# Altium PCB BrushlessMiniModule.PcbDoc
Units mm, origin at the board's own origin, x right, y up, seen from the top; angles counter-clockwise.
Board outline 68 x 52 mm, 2 copper layers (Top Layer, Bottom Layer), stack 1.571 mm thick; 44 components, 31 nets, 148 pads, 29 vias.
Unrouted connection lines stored in the file: 67.
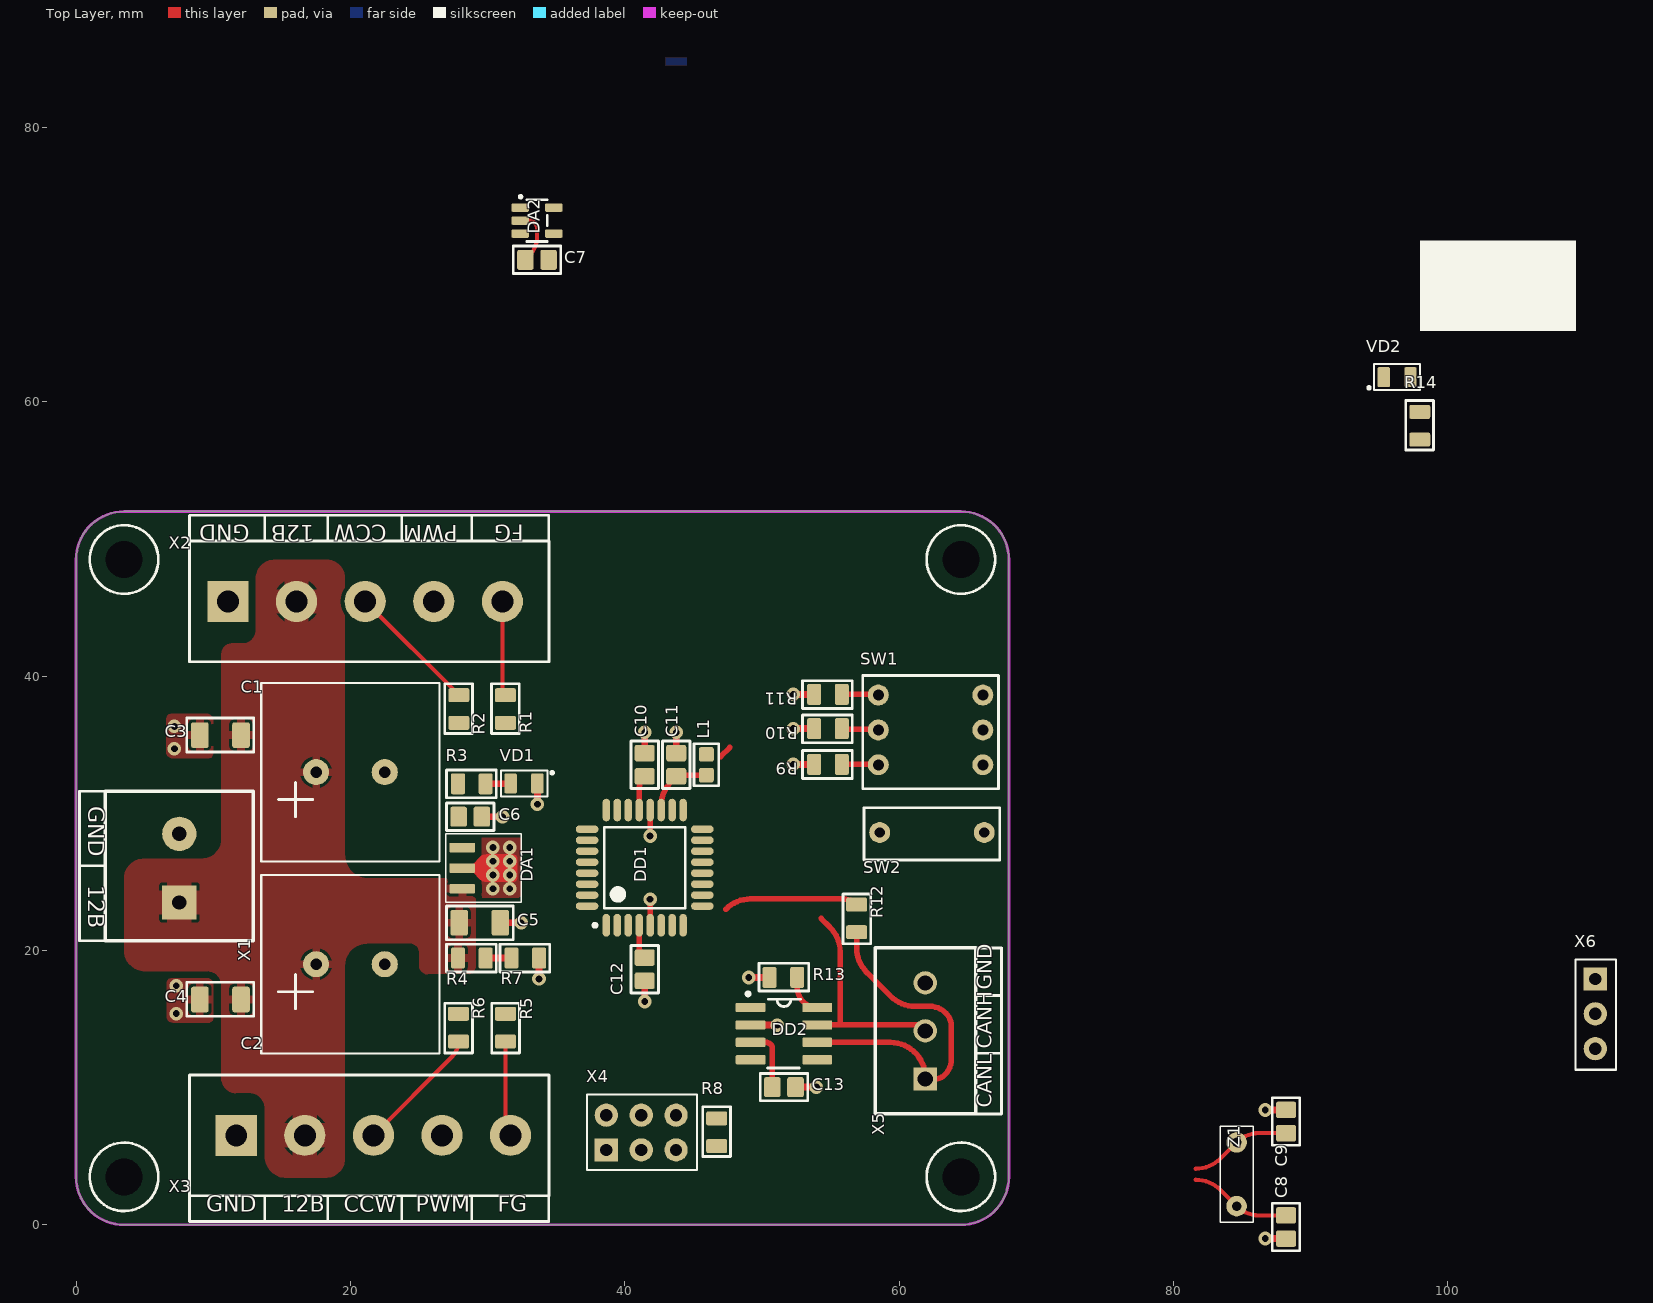
[diagram p0: Top Layer view]
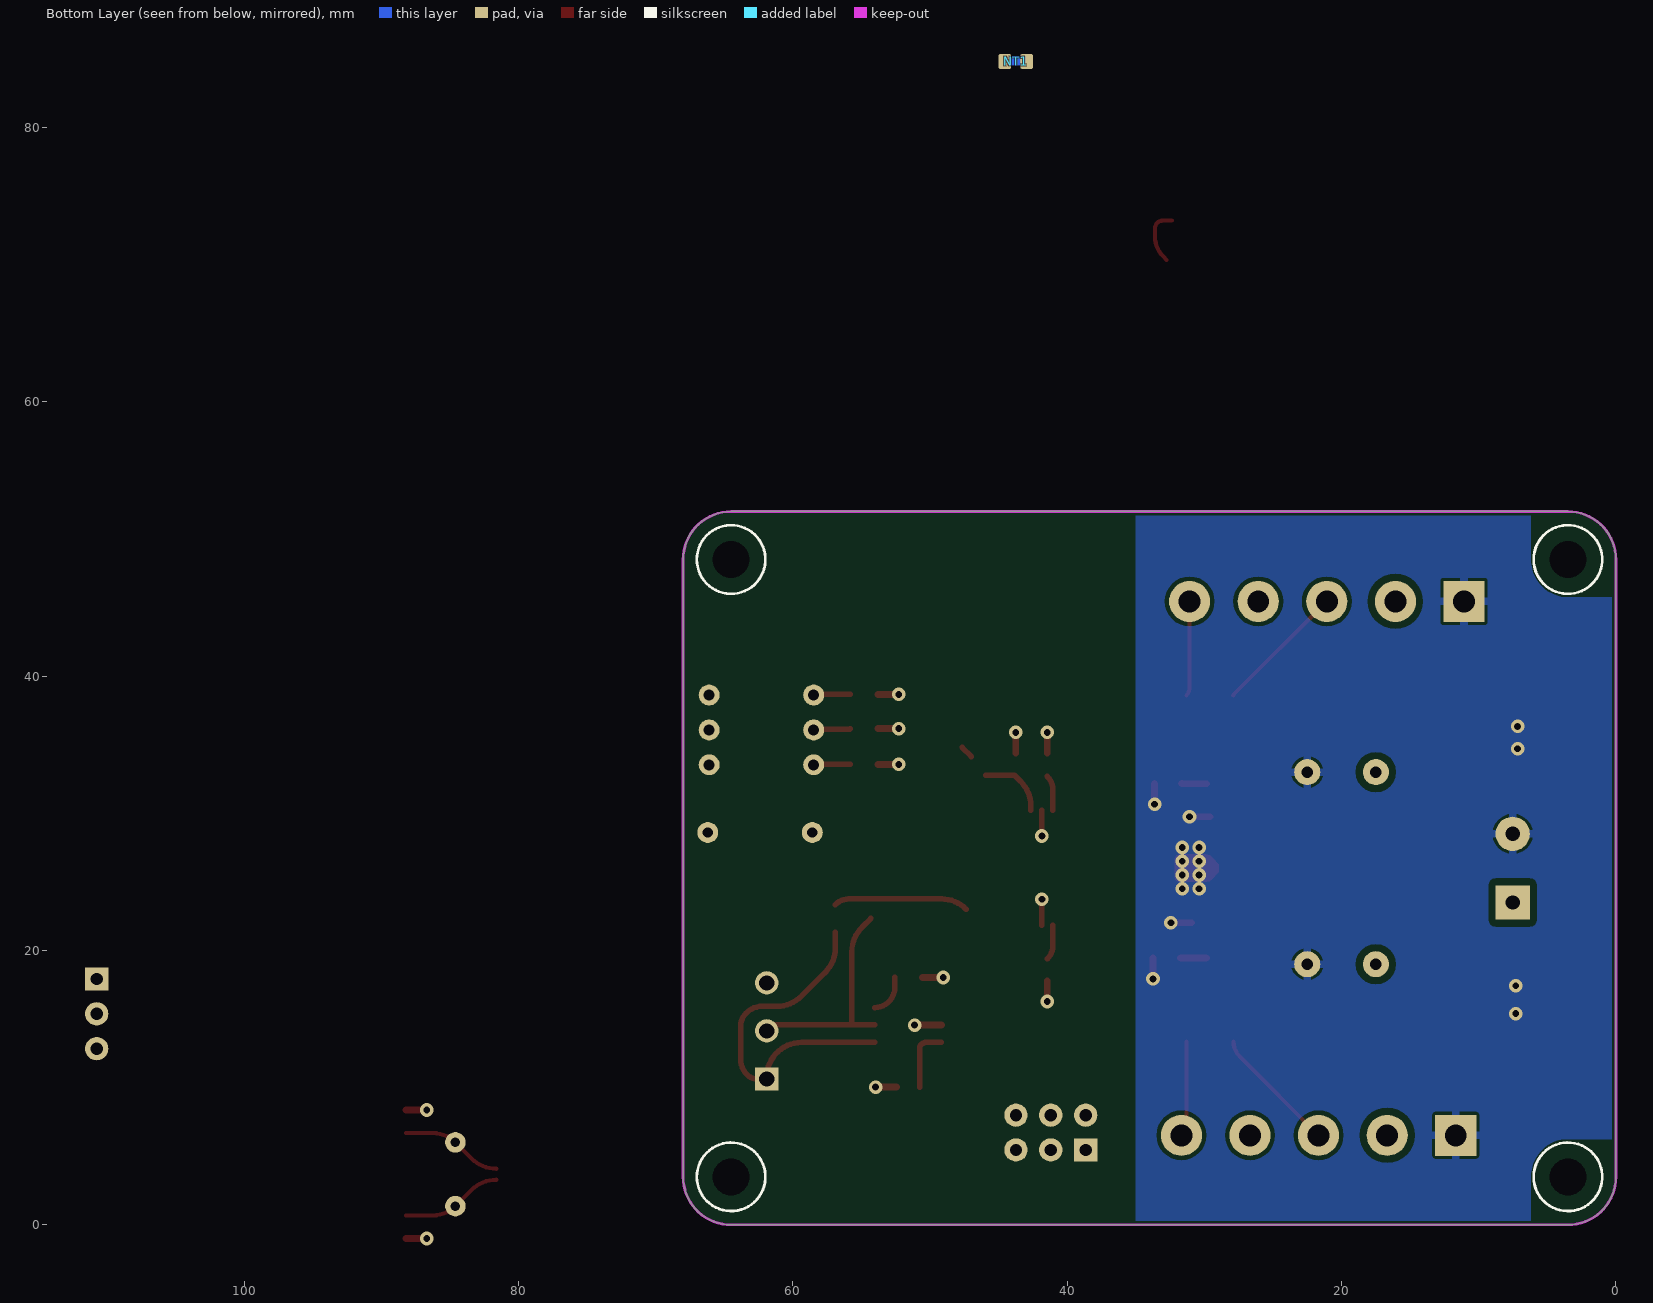
[diagram p1: Bottom Layer view, seen from below]

## Layer stack, top to bottom
Top Solder: solder mask 0.0102, Solder Resist, Dk 3.5
Top Layer: signal copper 0.0356
Dielectric 1: dielectric 1.5, FR-4, Dk 4.8
Bottom Layer: signal copper 0.0356
Bottom Solder: solder mask 0.0102, Solder Resist, Dk 3.5

## Board outline
0,3.5 ccw(c3.5,3.5) 3.5,0 64.5,0 ccw(c64.5,3.5) 68,3.5 68,48.5 ccw(c64.5,48.5) 64.5,52 3.5,52 ccw(c3.5,48.5) 0,48.5

## Design rules (kind name [scope] priority, off if disabled: settings)
Clearance Clearance_POWER_12B [InNet('12B') vs InNet('GND')] p1: gap=0.5
Clearance Clearance_POWER_5B [InNet('5B') vs InNet('DGND')] p2: gap=0.3 except(0.2: SMDPad-SMDPad; 0.4: Arc-THPad Track-THPad THPad-THPad THPad-Fill THPad-Poly THPad-Region)
Clearance [All] p3: gap=0.2 except(0.3: Arc-THPad Track-THPad THPad-THPad THPad-Via THPad-Fill THPad-Poly THPad-Region THPad-Text)
HoleSize [All] p1: absolutevalues=TRUE maxlimit=5 minlimit=0.2 maxpercent=80.000 minpercent=20.000
HoleToHoleClearance [All] p1: gap=0 allowstackedmicrovias=TRUE
MinimumSolderMaskSliver [All] p1: minsoldermaskwidth=0.15
PolygonConnect NetTieDirect [InComponentClass('NetTieDirect')] p1: connectstyle=Direct reliefconductorwidth=0.254 reliefentries=4 polygonreliefangle="90 Angle" airgapwidth=0.254
PolygonConnect NetTieRelief [InComponentClass('NetTieRelief')] p2: connectstyle=Direct reliefconductorwidth=0.6 reliefentries=4 polygonreliefangle="90 Angle" airgapwidth=0.2
PolygonConnect PolygonConnect_GND [HasFootprint('TERMINAL 2 way-5mm') vs InNet('GND')] p3: connectstyle=Direct reliefconductorwidth=0.6 reliefentries=4 polygonreliefangle="90 Angle" airgapwidth=0.2
PolygonConnect PolygonConnect_GND_12B [HasFootprint('TERMINAL-2WAY-5MM') vs InNet('12B')] p4: connectstyle=Relief reliefconductorwidth=1.8 reliefentries=4 polygonreliefangle="90 Angle" airgapwidth=0.2
PolygonConnect PolygonConnect_GND_12B_2 [HasFootprint('TERMINAL-5WAY-5MM') vs InNet('12B')] p5: connectstyle=Relief reliefconductorwidth=1.8 reliefentries=4 polygonreliefangle="90 Angle" airgapwidth=0.2
PolygonConnect PolygonConnect_GND_12B_3 [HasFootprint('TERMINAL-5WAY-5MM_') vs InNet('12B')] p6: connectstyle=Relief reliefconductorwidth=1.8 reliefentries=4 polygonreliefangle="90 Angle" airgapwidth=0.2
PolygonConnect PolygonConnect_GND_12B_1 [HasFootprint('TERMINAL 3 way-3.5mm') vs InNet('12B')] p7: connectstyle=Direct reliefconductorwidth=0.6 reliefentries=4 polygonreliefangle="90 Angle" airgapwidth=0.2
PolygonConnect PolygonConnect_GND_1 [HasFootprint('TERMINAL 3 way-3.5mm') vs InNet('GND')] p8: connectstyle=Direct reliefconductorwidth=0.6 reliefentries=4 polygonreliefangle="90 Angle" airgapwidth=0.2
PolygonConnect PolygonConnect_via [IsVia] p9: connectstyle=Direct reliefconductorwidth=0.6 reliefentries=4 polygonreliefangle="90 Angle" airgapwidth=0.2
PolygonConnect [All] p10: connectstyle=Relief reliefconductorwidth=0.6 reliefentries=4 polygonreliefangle="90 Angle" airgapwidth=0.2
RoutingVias [All] p1: holewidth=0.711 width=1.27 viastyle="Through Hole" minholewidth=0.711 minwidth=1.27 maxholewidth=0.711 maxwidth=1.27
SilkToSilkClearance [All] p1: silktosilkclearance=0
SilkToSolderMaskClearance [IsPad] p1: minsilkscreentomaskgap=0 clearancetoexposedcopper=TRUE
SolderMaskExpansion [All] p1: expansion=0.05
Width [All] p1: maxlimit=3 minlimit=0.2 preferedwidth=0.3
25 further rules are at their usual default settings.

## Components (designator, comment, footprint, x,y, rotation, side; value= is the part's Value field where it differs from the comment)
C1 "Capacitor_pol" K50-35(13X25)_V 20,33 r90 top
C2 "Capacitor_pol" K50-35(13X25)_V 20,19 r90 top
C3 "Capacitor" C1206 10.552,35.724 r0 top
C4 "Capacitor" C1206 10.552,16.45 r0 top
C5 "Capacitor" C1206 29.4,22 r180 top
C6 "Capacitor" C0805 28.73,29.75 r180 top
C7 "Capacitor" C0805 33.6,70.347 r180 top
C8 "Capacitor" C0805 88.2,-0.158 r270 top
C9 "Capacitor" C0805 88.2,7.532 r90 top
C10 "Capacitor" C0805 41.45,33.538 r270 top
C11 "Capacitor" C0805 43.75,33.538 r270 top
C12 "Capacitor" C0805 41.45,18.638 r90 top
C13 "Capacitor" C0805 51.6,10.038 r180 top
DA1 "L78L05ABUTR" SOT-89-3 28.15,26 r270 top
DA2 "LMV321ILT" SOT23-5 33.6,73.205 r0 top
DD1 "ATmega32M1-AU" TQFP-32 41.45,26.038 r90 top
DD2 "MCP2551-I/SN" SO8 51.6,13.938 r0 top
L1 "Inductor" L0603 45.95,33.538 r90 top
NT1 "" Pofigistor0603 43.75,84.805 r0 bottom net-tie
R1 "Resistor_0,125Вт" R0805 31.3,37.6 r90 top
R2 "Resistor_0,125Вт" R0805 27.9,37.6 r90 top
R3 "Resistor_0,125Вт" R0805 28.85,32.15 r180 top
R4 "Resistor_0,125Вт" R0805 28.85,19.45 r180 top
R5 "Resistor_0,125Вт" R0805 31.306,14.375 r270 top
R6 "Resistor_0,125Вт" R0805 27.875,14.375 r270 top
R7 "Resistor_0,125Вт" R0805 32.746,19.45 r180 top
R8 "Resistor_0,125Вт" R0805 46.7,6.75 r90 top
R9 "Resistor_0,125Вт" R0805 54.81,33.57 r180 top
R10 "Resistor_0,125Вт" R0805 54.81,36.17 r180 top
R11 "Resistor_0,125Вт" R0805 54.81,38.67 r180 top
R12 "Resistor_0,125Вт" R0805 56.9,22.338 r270 top
R13 "Resistor_0,125Вт" R0805 51.563,18.038 r0 top
R14 "Resistor_0,125Вт" R0805 97.95,58.25 r90 top
SW1 "Name" DIP3 66.1,33.537 r90 top
SW2 "DS1040-01" DIP1 66.2,28.6 r90 top
VD1 "LED" L_0805 32.65,32.18 r180 top
VD2 "LED" L_0805 96.3,61.793 r0 top
X1 "Header_2_trm" TERMINAL-2WAY-5MM 7.525,26 r90 top
X2 "Header_5_trm" TERMINAL-5WAY-5MM 21.075,45.448 r0 top
X3 "Header_5_trm" TERMINAL-5WAY-5MM_ 21.675,6.525 r0 top
X4 "Программатор ISP mkII" PLS2-6 41.296,6.735 r90 top
X5 "Header_3_trm" TERMINAL-3WAY-3.5MM 61.9,5.388 r90 top
X6 "Header_3_plg" PLS-3 110.75,15.382 r0 top
Z1 "Crystal" HC-49S 84.6,3.687 r270 top

## Footprints (in the part's own frame and the unit in brackets; to place one, negate y for a bottom-side part, rotate by r counter-clockwise, add the part's x,y. Pads: shape width x height; smd on the part's side, far side on the other; paste and mask are expansions set on the pad)
C0805 [mm]
  rrect25% 1.21x1.46 smd paste-5: 1(-0.845,0) 2(0.845,0)
  silkscreen extent -1.73,-1 1.73,1, body extent -1,-0.62 1,0.63, height 0.78
C1206 [mm]
  rrect25% 1.28x1.87 smd: 1(-1.528,-0.024) 2(1.472,-0.024)
  silkscreen extent -2.48,-1.25 2.4,1.23, body extent -1.6,-0.85 1.6,0.85, height 1.75
DIP1 [mil]
  round 60 hole 30: 1(0,0) 2(0,300)
  silkscreen extent -79,-45 71,345, body extent -80,-42 71,342, height 269
DIP3 [mil]
  round 60 hole 31.5: 1(0,0) 2(100,0) 3(200,0) 4(200,300) 5(100,300) 6(0,300)
  silkscreen extent -69,-45 256,345, body extent -69,-43 251,346, height 276
HC-49S [mm] "Кварцевый резонатор"
  round 1.5 hole 0.7: 1(-2.325,0) 2(2.325,0)
  silkscreen extent -3.5,-1.2 3.5,1.2, body extent -5.67,-2.32 5.68,2.33, height 3.6
K50-35(13X25)_V [mm]
  round 1.9 hole 0.85 mask+0.102: 1(0,2.5)
  round 1.9 hole 0.85: 2(0,-2.5)
  silkscreen extent -6.5,-6.5 6.5,6.5, body extent -6.25,-6.25 6.25,6.25, height 25
L0603 [mm]
  rrect25% 1.05x1.07 smd paste-5: 1(-0.76,0) 2(0.76,0)
  silkscreen extent -1.53,-0.9 1.53,0.9, body extent -0.8,-0.4 0.8,0.4, height 0.8
L_0805 [mm] "SMD LED LAMP"
  rrect25% 0.91x1.46 smd: 1(-0.975,0) 2(0.975,0)
  silkscreen extent -2.15,-0.95 1.68,0.95, body extent -1.01,-0.62 1.01,0.63, height 1.1
PLS2-6 [mm] "Разъем для программатора ISP"
  rect 1.7x1.7 hole 0.9: 1(-1.275,2.64)
  round 1.7 hole 0.9: 2(1.265,2.64) 3(-1.275,0.1) 4(1.265,0.1) 5(-1.275,-2.44) 6(1.265,-2.44)
  silkscreen extent -2.73,-3.98 2.77,4.05, body extent -2.54,-3.81 2.54,3.81, height 8.54
PLS-3 [mm] "Разъем для программатора ISP"
  rect 1.7x1.7 hole 0.9: 1(0,2.54)
  round 1.7 hole 0.9: 2(0,0) 3(0,-2.54)
  silkscreen extent -1.45,-4.08 1.5,3.95, body extent -1.26,-3.91 1.28,3.71, height 8.54
Pofigistor0603 [mm]
  rrect25% 0.92x1.08 smd paste+0: 1(-0.8,0)
  rrect25% 0.92x1.08 smd: 2(0.8,0)
  Top Layer region: -0.8,0.3 0.8,0.3 0.8,-0.3 -0.8,-0.3
R0805 [mm] "Chip Resistor, 2-Leads, Body 2,10x1,30mm, IPC Medium Density"
  rrect25% 1.02x1.53 smd paste-5: 1(-1.008,0) 2(1.008,0)
  silkscreen extent -1.78,-1 1.85,1.02, body extent -1.1,-0.7 1.1,0.7, height 0.55
SO8 [mm]
  rrect25% 2.17x0.68 smd: 1(-2.43,1.905) 2(-2.43,0.635) 3(-2.43,-0.635) 4(-2.43,-1.905) 5(2.43,-1.905) 6(2.43,-0.635) 7(2.43,0.635) 8(2.43,1.905)
  silkscreen extent -2.74,-2.5 1.2,3.02, body extent -3,-2.54 3,2.54, height 1.7
SOT23-5 [mm]
  rrect25% 1.26x0.61 smd: 1(-1.225,0.95) 2(-1.225,0) 3(-1.225,-0.95) 4(1.225,-0.95) 5(1.225,0.95)
  silkscreen extent -1.3,-1.52 0.75,1.84, body extent -1.6,-1.56 1.6,1.55, height 1.45
SOT-89-3 [mm]
  rrect25% 0.7x1.87 smd: 1(-1.5,0) 2(0,0) 3(1.5,0)
  Top Layer region: -0.3,0.8 -0.829,1.329 -0.956,1.518 -1,1.741 -1,1.741 -1,3.7 -0.96,3.85 -0.85,3.96 -0.7,4 -0.7,4 0.7,4 0.85,3.96 0.96,3.85 1,3.7 1,3.7 1,1.741 0.956,1.518 0.829,1.329 0.829,1.329 0.3,0.8
  silkscreen extent -2.5,-1.2 2.5,4.3, body extent -2.25,-0.5 2.25,3.75, height 1.54
TERMINAL-2WAY-5MM [mm]
  rect 2.5x2.5 hole 1.05: 1(-2.5,0)
  round 2.5 hole 1.05: 2(2.5,0)
  silkscreen extent -5.3,-5.4 5.6,5.4, body extent -5,-5.07 5.3,5.13, height 14.3
TERMINAL-3WAY-3.5MM [mm]
  rect 1.7x1.7 hole 1.1: 1(5.25,0)
  round 1.7 hole 1.1: 2(8.75,0) 3(12.25,0)
  silkscreen extent 2.7,-3.7 14.8,3.65, body extent 3,-3.37 14.5,3.43, height 8.4
TERMINAL-5WAY-5MM [mm]
  rect 3x3 hole 1.6: 1(-10,0)
  round 3 hole 1.6: 2(-5,0) 3(0,0) 4(5,0) 5(10,0)
  silkscreen extent -12.8,-4.4 13.4,4.4, body extent -12.5,-4.1 13.07,4.05, height 10
TERMINAL-5WAY-5MM_ [mm]
  rect 3x3 hole 1.6: 1(-10,0)
  round 3 hole 1.6: 2(-5,0) 3(0,0) 4(5,0) 5(10,0)
  silkscreen extent -13.4,-4.4 12.8,4.4, body extent -13.08,-4.05 12.48,4.1, height 10
TQFP-32 [mm] "Thin QFP, 32-Leads, Body 7x7mm, Pitch 0.8mm, IPC Medium Density"
  oval 1.65x0.55 smd: 1(-4.2,2.8) 2(-4.2,2) 3(-4.2,1.2) 4(-4.2,0.4) 5(-4.2,-0.4) 6(-4.2,-1.2) 7(-4.2,-2) 8(-4.2,-2.8) 17(4.2,-2.8) 18(4.2,-2) 19(4.2,-1.2) 20(4.2,-0.4) 21(4.2,0.4) 22(4.2,1.2) 23(4.2,2) 24(4.2,2.8)
  oval 0.55x1.65 smd: 9(-2.8,-4.2) 10(-2,-4.2) 11(-1.2,-4.2) 12(-0.4,-4.2) 13(0.4,-4.2) 14(1.2,-4.2) 15(2,-4.2) 16(2.8,-4.2) 25(2.8,4.2) 26(2,4.2) 27(1.2,4.2) 28(0.4,4.2) 29(-0.4,4.2) 30(-1.2,4.2) 31(-2,4.2) 32(-2.8,4.2)
  silkscreen extent -4.32,-2.95 2.95,3.75, body extent -4.6,-4.6 4.6,4.6, height 1.2

## Part data
C1 C2: library part cap262, "Конденсатор полярный"
C3 C4: library part cap188, "Конденсатор"
C5: library part cap183, "Конденсатор"
C6 C7 C10 C11 C12 C13: library part cap161, "Конденсатор"
C8 C9: library part cap222, "Конденсатор"
DA1: library part pwr6, "Cтабилизатор напряжения (+5В; 0.1А), 4%, (-40...+125C)"
DA2: library part amp10, "HIGH-DRIVE OPERATIONAL AMPLIFIERS WITH SHUTDOWN"
DD1: library part microcont12, "Микроконтроллер 8-Бит, AVR, 16МГц, 32КБ Flash"
DD2: library part interf12, "High-Speed CAN Transceiver"
L1: library part ind0, "EMI Suppression Filter"
NT1: library part res1930
R1 R2 R5 R6 R8 R9 R10 R11 R13: library part res97, "Резистор"
R3 R7 R14: library part res66, "Резистор"
R4: library part res76, "Резистор"
R12: library part res51, "Резистор"
SW1: library part btn6, "DIP переключатель адреса"
SW2: library part btn1, "DIP переключатель"
VD1 VD2: library part diode5, "Светодиод"
X1: library part connect21, "Разъем - 2 конт. клеммник"
X2: library part connect61, "Разъем - 5 конт. клеммник"
X3: library part connect62, "Разъем - 5 конт. клеммник"
X4: library part connect0, "Разъем - 6 конт. розетка"
X5: library part connect35, "Разъем - 3 конт. клеммник"
X6: library part connect33, "Разъем - 3 конт. вилка"
Z1: library part crystal7, "Кварцевый резонатор"

## Free pads (board coordinates)
  round 0 hole 2.7 unplated: ""(3.5,3.5) ""(3.5,48.5) ""(64.5,3.5) ""(64.5,48.5)

## Via types
v1: diameter 1, hole 0.5, Top Layer to Bottom Layer, tented both sides, 29 vias

## Nets (pads, with @x,y where several pads share a name; then routed paths per layer and width w, separated by ;. In a path a pad name is that pad's centre, name@x,y a point inside that pad or via, vN(x,y) a via of type N, cw(c..) or ccw(c..) an arc to the next point about the centre after c; other vN are vias at no path point)
5B: C6.2 C7.2 C12.2 C13.2 DA1.1 DA2.2 DD1.4 DD2.3 L1.2 R1.1 R2.1 R3.2 R5.1 R6.1 R8.2 SW1.4 SW1.5 SW1.6 X4.2 | length 11.3
  Top Layer w0.3: DA2.2 33.05,73.205 cw(c33.05,72.655) 33.6,72.655 33.6,72.055 cw(c31.515,72.055) 32.989,70.581 C7.2
  Top Layer w0.4: DD1.4 41.05,20.348 ccw(c42.416,20.348) C12.2@41.45,19.383 ; DD2.3 50.29,13.303 cw(c50.29,12.838) 50.755,12.838 C13.2
12B: C1.1 C2.1 C3.2 C4.2 C5.2 DA1.3 R4.2 X1.1 X2.2 X3.2
ADR0: DD1.17 R11.1 SW1.1 | length 2.5
  Top Layer w0.4: R11.1 58.29,38.67
ADR1: DD1.18 R10.1 SW1.2 | length 2.5
  Top Layer w0.4: R10.1 ccw(c55.914,36.266) 55.914,36.13 58.29,36.13
ADR2: DD1.22 R9.1 SW1.3 | length 2.5
  Top Layer w0.4: R9.1 58.242,33.57 ccw(c58.242,33.638) 58.29,33.59
CW/CCW_A: DD1.23 R2.2 X2.3 | length 9.7
  Top Layer w0.3: X2.3 ccw(c21.112,45.448) 21.086,45.422 R2.2
CW/CCW_B: DD1.24 R6.2 X3.3 | length 9.3
  Top Layer w0.3: X3.3 27.421,12.271 ccw(c26.324,13.368) R6.2
DGND: C7.1 C8.2 C9.2 C10.1 C11.1 C12.1 C13.1 DA2.5 DD1.5 DD1.20 DD2.2 NT1.2 R9.2 R10.2 R11.2 R13.1 VD2.1 X4.6 X5.3 X6.3 | length 20.9
  Top Layer w0.4: DD1.5 v1(41.85,23.738) ; v1(41.85,28.337) DD1.20
  Top Layer w0.5: v1(41.45,16.275) C12.1 ; C10.1 v1(41.45,35.9) ; C11.1 v1(43.75,35.9) ; v1(49.037,18.038) R13.1 ; DD2.2 v1@51.12,14.573 ; v1(52.285,33.57) R9.2 ; v1(52.285,36.17) R10.2 ; v1(52.285,38.67) R11.2 ; C13.1 v1(53.963,10.038) ; v1(86.682,-1.003) C8.2 ; v1(86.682,8.377) C9.2
  other v1: 51.12,14.555
FG_A: DD1.26 R1.2 X2.5 | length 6.9
  Top Layer w0.3: X2.5 31.075,39.151 ccw(c31.843,39.151) R1.2
FG_B: DD1.27 R5.2 X3.5 | length 6.9
  Top Layer w0.3: R5.2 31.306,7.416 ccw(c32.566,7.416) X3.5
GND: C1.2 C2.2 C3.1 C4.1 C5.1 C6.1 DA1.2 NT1.1 R7.1 VD1.1 X1.2 X2.1 X3.1 | length 6.1
  Top Layer w0.5: C6.1 v1(31.093,29.75) ; C5.1 v1(32.446,22.024) ; v1(33.625,30.662) VD1.1 ; v1(33.754,17.932) R7.1
  other v1: 7.3,15.393 7.3,17.427 30.381,24.5 31.618,24.5 30.381,25.5 31.618,25.5 30.381,26.5 31.618,26.5 30.381,27.5 31.618,27.5 7.163,34.705 7.163,36.338
INF_LED: DD1.13 R14.1
MISO: DD1.1 DD1.31 R8.1 X4.1 X4.5
MOSI/TX: DD1.2 X4.4 X6.2
NetC10_2: C10.2 DD1.21 | length 2.6
  Top Layer w0.4: DD1.21 41.05,31.727 cw(c42.416,31.727) C10.2
NetC11_2: C11.2 DD1.19 L1.1 | length 5
  Top Layer w0.4: DD1.19 42.65,30.54 cw(c45.19,30.54) 43.394,32.336 C11.2 cw(c43.955,32.487) 43.955,32.777 L1.1
NetDA2_1: DA2.1 R4.1 R7.2 | length 1.9
  Top Layer w0.5: R4.1 R7.2
NetDD2_6: DD2.6 R12.2 X5.1 | length 25.6
  Top Layer w0.4: DD2.6 59.36,13.303 cw(c59.36,10.763) 61.9,10.763 X5.1 62.608,10.638 ccw(c62.608,11.662) 63.332,10.938 ccw(c62.203,12.067) 63.8,12.067 63.8,14.472 ccw(c62.434,14.472) 63.4,15.438 ccw(c62.193,14.23) 62.193,15.938 61.152,15.938 cw(c61.152,18.478) 59.356,16.681 57.644,18.394 cw(c59.44,20.19) 56.9,20.19 R12.2
NetDD2_7: DD2.7 SW2.1 X5.2 | length 16.4
  Top Layer w0.4: DD2.7 55.8,14.573 ; 54.313,22.338 54.956,21.694 cw(c53.16,19.898) 55.7,19.898 55.7,14.814 ccw(c56.041,14.814) 55.8,14.573 ; X5.2 ccw(c61.465,14.138) 61.465,14.573 55.8,14.573
NetDD2_8: DD2.8 R13.2 | length 3
  Top Layer w0.4: R13.2 52.57,17.303 ccw(c54.03,17.303) DD2.8
NetR3_1: R3.1 VD1.2 | length 1.8
  Top Layer w0.5: R3.1 31.603,32.15 ccw(c31.603,32.252) VD1.2
NetR12_1: R12.1 SW2.2 | length 10.8
  Top Layer w0.4: 46.993,34.138 47.666,34.811 ; 47.366,23.011 cw(c49.162,21.215) 49.162,23.755 55.91,23.755 cw(c55.91,22.355) R12.1
NetR14_2: R14.2 VD2.2
OSC1: C8.1 DD1.10 Z1.2 | length 7.4
  Top Layer w0.3: 81.623,3.288 cw(c81.623,0.748) 83.419,2.544 Z1.2 ccw(c86.23,2.992) 86.23,0.687 C8.1
OSC2: C9.1 DD1.11 Z1.1 | length 7.4
  Top Layer w0.3: 81.623,4.088 ccw(c81.623,6.628) 83.419,4.831 Z1.1 cw(c86.229,4.383) 86.229,6.687 C9.1
PWM_A: DD1.9 X2.4
PWM_B: DD1.3 X3.4
RX_CAN: DD1.7 DD2.4
SCK/RX: DD1.12 X4.3 X6.1
TX_CAN: DD1.6 DD2.1
VOLTAGE: DA2.3 DA2.4 DD1.14
pads on no net: DD1.8 DD1.15 DD1.16 DD1.25 DD1.28 DD1.29 DD1.30 DD1.32 DD2.5

## Polygon pours and split planes (outlines as drawn)
GND on Top Layer "Top Layer-No Net" (solid, remove dead copper, pour order 22): 9.994,34.363 9.994,36.786 ccw(c9.52,36.786) 9.52,37.26 6.959,37.26 ccw(c6.959,36.891) 6.59,36.891 6.59,34.442 ccw(c7.021,34.442) 7.02,34.011 9.638,34.008 ccw(c9.638,34.363)
GND on Top Layer "Top Layer-No Net" (solid, remove dead copper, pour order 6): 10.013,15.089 10.013,17.512 ccw(c9.539,17.512) 9.539,17.986 6.978,17.986 ccw(c6.978,17.617) 6.609,17.617 6.609,15.168 ccw(c7.04,15.168) 7.039,14.737 9.657,14.734 ccw(c9.657,15.089)
12B on Top Layer "Top Signal Layer-No Net" (solid, remove dead copper, pour order 24): 3.5,25.25 3.5,20 ccw(c5,20) 5,18.5 9.513,18.5 cw(c9.513,17.413) 10.6,17.413 10.6,10.65 ccw(c11.65,10.65) 11.65,9.6 12.65,9.6 cw(c12.65,8.5) 13.75,8.5 13.75,5 ccw(c15.325,5) 15.325,3.425 18.175,3.425 ccw(c18.175,4.85) 19.6,4.85 19.6,18.9 cw(c21.2,18.9) 21.2,20.5 24.4,20.5 cw(c24.4,19.9) 25,19.9 25,18.9 ccw(c25.65,18.9) 25.65,18.25 28.525,18.25 ccw(c28.525,18.845) 29.12,18.845 29.12,25.25 21.35,25.25 cw(c21.35,27) 19.6,27 19.6,47.15 ccw(c18.252,47.15) 18.252,48.498 14.498,48.498 ccw(c14.498,47.1) 13.1,47.1 13.1,43.35 cw(c12.15,43.35) 12.15,42.4 11.4,42.4 ccw(c11.4,41.6) 10.6,41.6 10.6,28.141 cw(c9.159,28.141) 9.159,26.7 4.95,26.7 ccw(c4.95,25.25)
GND on Top Layer "Top Signal Layer-No Net" (solid, remove dead copper, pour order 28): 29.575,28.2 29.575,23.827 32.4,23.827 32.4,28.2
GND on Bottom Layer "Top Signal Layer-No Net" (solid, remove dead copper, pour order 26): 0,52 0,0 35,0 35,52

## Keep-outs
Keep-Out Layer:
  the board outline again, w0.2

## Other copper
Bottom Layer:
  pour cut-out: 6.2,52 0,52 0,45.748 3.483,45.748 ccw(c3.483,48.464) 6.2,48.464
  pour cut-out: 6.2,0 0,0 0,6.252 3.483,6.252 cw(c3.483,3.536) 6.2,3.536

## Silkscreen, mask and mechanical layers (free items; w line width, h text height)
Top Overlay:
  circle w0.2: c3.5,3.5 r2.5
  circle w0.2: c64.5,3.5 r2.5
  circle w0.2: c64.5,48.5 r2.5
  circle w0.2: c3.5,48.5 r2.5
  rectangle: 97.95,65.169 109.331,71.743
  lines w0.2: 0.246,31.6 0.246,20.718 0.264,20.7 2.125,20.7 ; 0.273,31.6 2.125,31.6 ; 0.322,26.175 2.073,26.175 ; 8.275,2.125 8.275,0.264 8.293,0.246 34.457,0.246 34.457,2.196 ; 8.275,49.848 8.275,51.709 8.293,51.727 34.457,51.727 34.457,49.777 ; 13.75,0.322 13.75,2.073 ; 13.75,49.9 13.75,51.651 ; 18.35,0.273 18.35,2.125 ; 18.35,49.848 18.35,51.7 ; 23.75,0.273 23.75,2.125 ; 23.75,49.848 23.75,51.7 ; 28.85,0.273 28.85,2.125 ; 28.85,49.848 28.85,51.7 ; 65.6,8.088 67.452,8.087 67.452,20.17 ; 65.6,12.513 67.452,12.513 ; 65.6,20.188 67.461,20.188 67.479,20.17 ; 65.652,16.713 67.403,16.712
  text "GND" at 12.65,51.425 h2 r180
  text "12B" at 17.35,51.408 h2 r180
  text "CCW" at 22.65,51.425 h2 r180
  text "FG" at 32.65,51.425 h2 r180
  text "PWM" at 27.816,51.405 h2 r180
  text "GND" at 0.5,30.5 h2 r270
  text "12B" at 0.5,24.75 h2 r270
  text "GND" at 67.1,17.138 h1.8 r90
  text "CANH" at 67.1,12.838 h1.8 r90
  text "CANL" at 67.1,8.538 h1.8 r90
  text "GND" at 9.5,0.548 h2
  text "12B" at 15,0.548 h2
  text "PWM" at 24.75,0.548 h2
  text "FG" at 30.75,0.548 h2
  text "CCW" at 19.508,0.5 h2
Bottom Overlay:
  circle w0.2: c3.5,3.5 r2.5
  circle w0.2: c64.5,3.5 r2.5
  circle w0.2: c64.5,48.5 r2.5
  circle w0.2: c3.5,48.5 r2.5